# Altium PCB 迷你四轴遥控器.PcbDoc
Units mm, origin at the board's own origin, x right, y up, seen from the top; angles counter-clockwise.
Board outline 122 x 76 mm, 2 copper layers (Top Layer, Bottom Layer); 44 components, 47 nets, 207 pads, 7 vias.
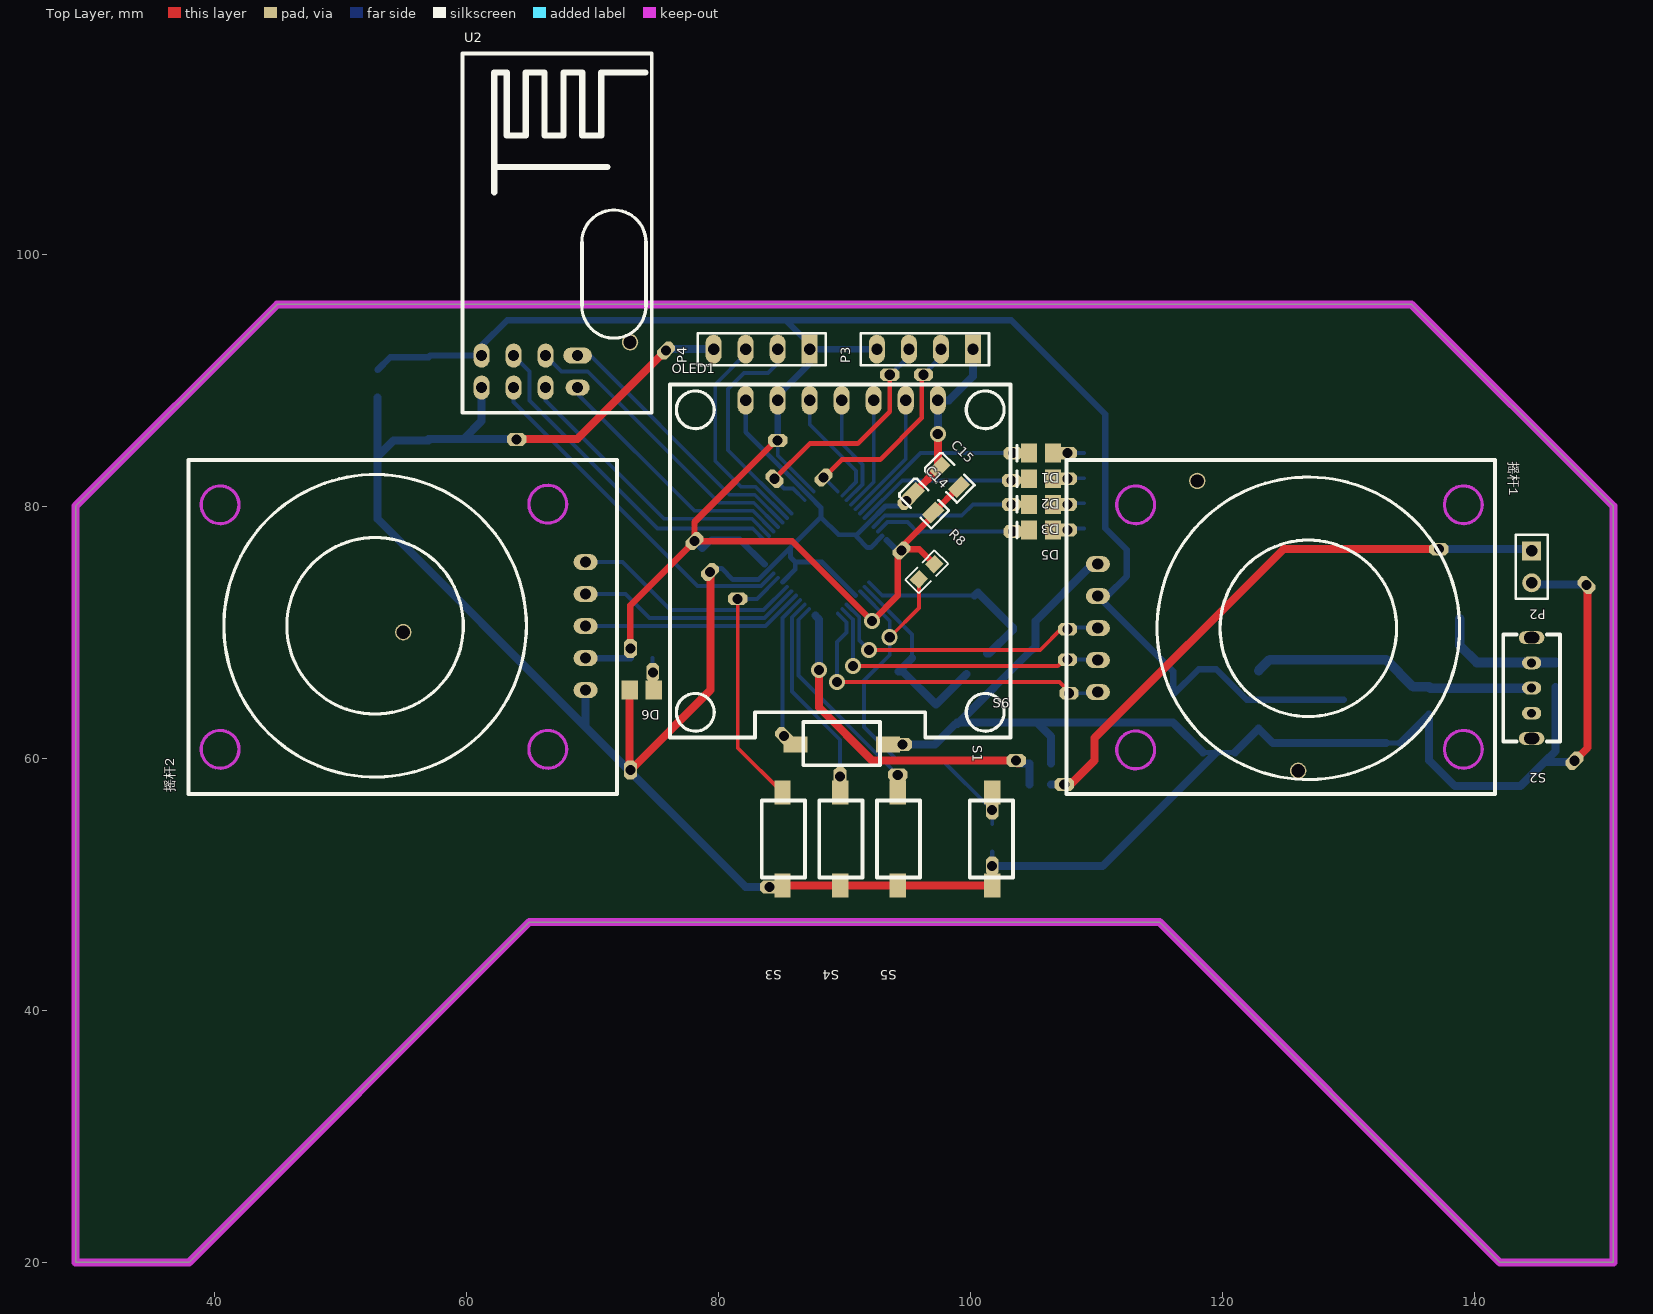
[diagram p0: Top Layer view]
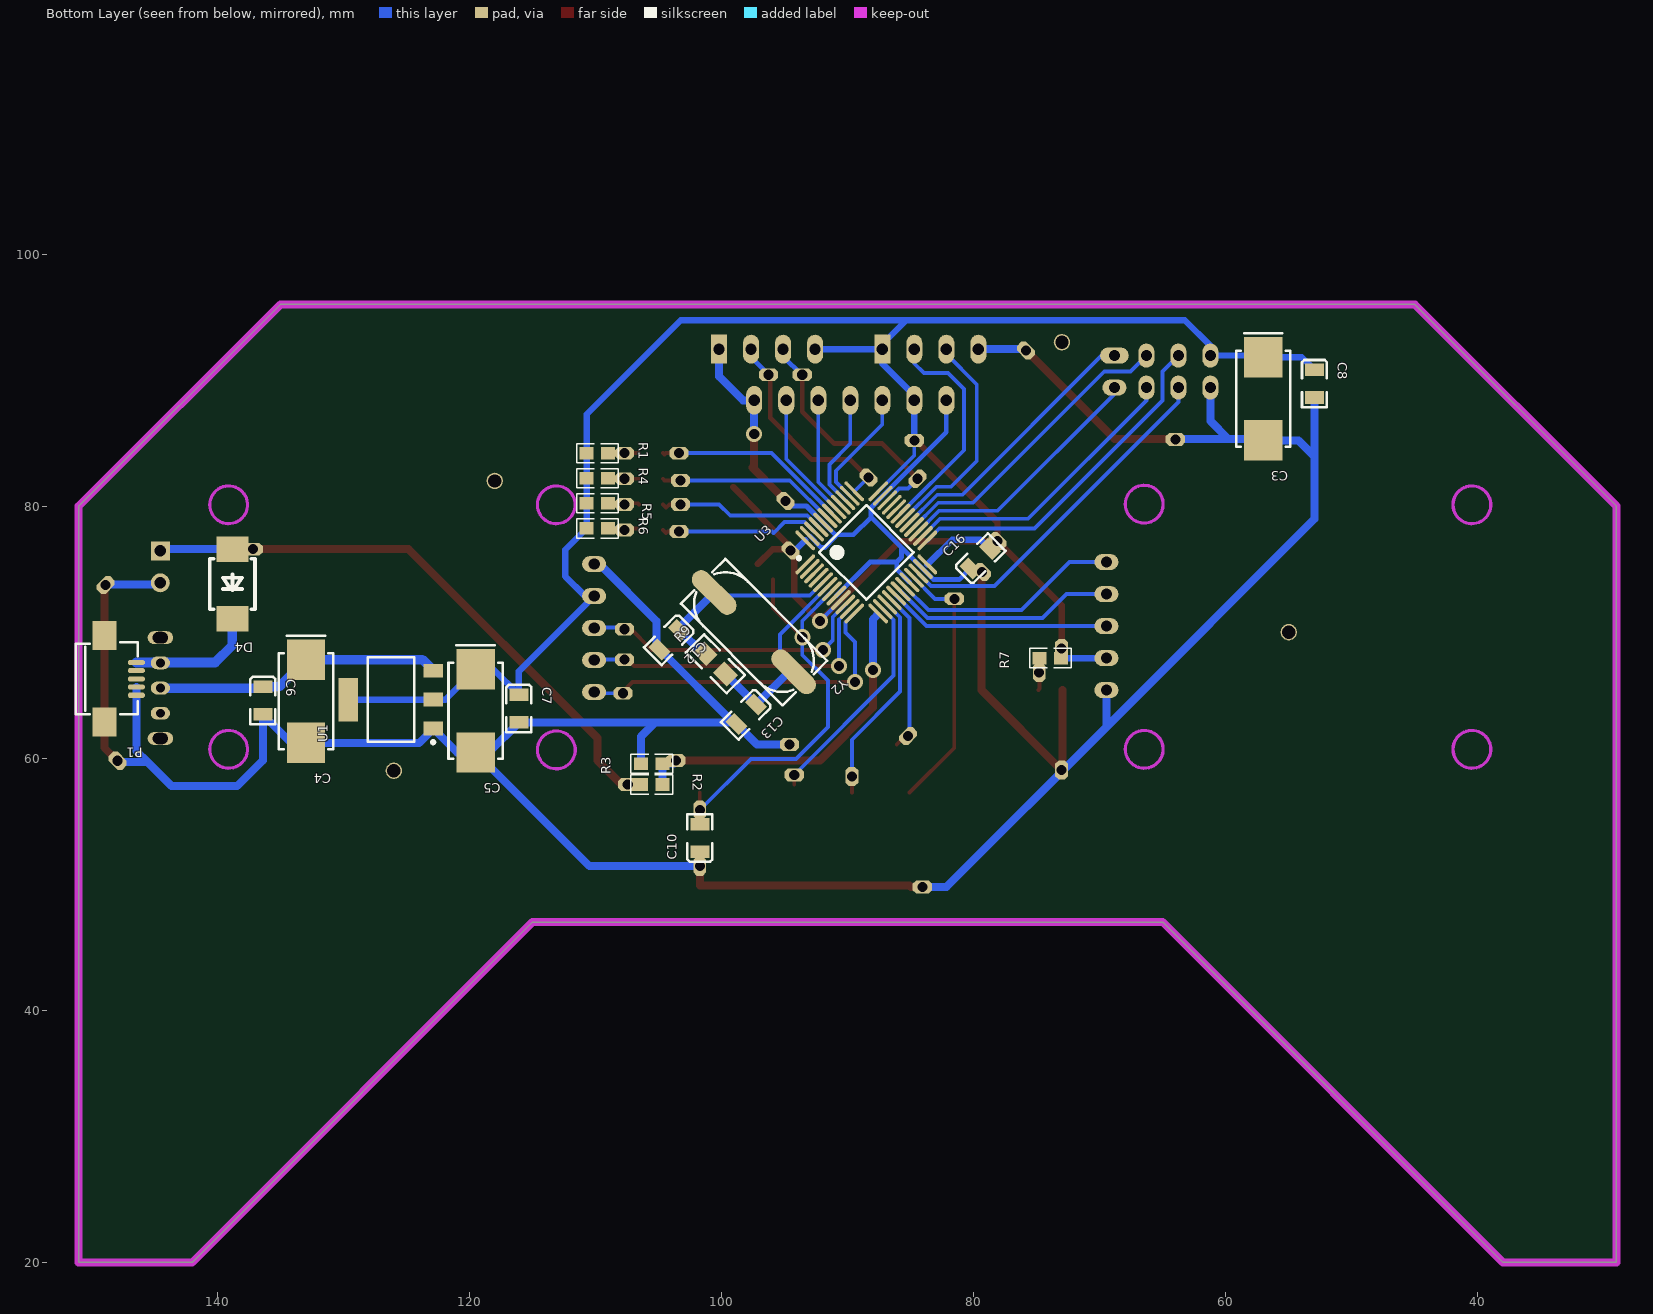
[diagram p1: Bottom Layer view, seen from below]

## Layer stack, top to bottom
Top Solder: solder mask 0.0102, Solder Resist, Dk 3.5
Top Layer: signal copper 0.0356
Dielectric 1: dielectric 0.32, FR-4, Dk 4.8
Bottom Layer: signal copper 0.0356
Bottom Solder: solder mask 0.0102, Solder Resist, Dk 3.5

## Board outline
29,20 29,80 45,96 135,96 151,80 151.003,80 151.003,20 142,20 115,47 65,47 38,20

## Design rules (kind name [scope] priority, off if disabled: settings)
Clearance [All] p1: gap=0.025
PolygonConnect [All] p1: connectstyle=Relief reliefconductorwidth=0.254 reliefentries=4 polygonreliefangle="90 Angle" airgapwidth=0.254
RoutingVias [All] p1: holewidth=0.711 width=1.27 viastyle="Through Hole" minholewidth=0.711 minwidth=1.27 maxholewidth=0.711 maxwidth=1.27
SolderMaskExpansion [All] p1: expansion=0.102
Width [All] p1: maxlimit=3 minlimit=0.254 preferedwidth=0.635
30 further rules are at their usual default settings.

## Components (designator, comment, footprint, x,y, rotation, side; value= is the part's Value field where it differs from the comment)
C3 "Cap Pol" CAP-7343 57.023,88.519 r270 bottom
C4 "Cap Pol" CAP-7343 132.969,64.516 r270 bottom
C5 "Cap Pol" CAP-7343 119.507,63.754 r270 bottom
C6 "Cap" C-0805 136.398,65.659 r270 bottom
C7 "Cap" C-0805 116.078,65.024 r270 bottom
C8 "Cap" C-0805 52.959,90.805 r270 bottom
C10 "Cap" C-0805 101.727,52.578 r90 bottom
C12 "Cap" C-0805 103.364,70.183 r315 bottom
C13 "Cap" C-0805 97.258,64.256 r315 bottom
C14 "Cap" C-0805 95.504,81.026 r315 top
C15 "Cap" C-0805 97.536,83.058 r315 top
C16 "Cap" C-0805 80.264,75.057 r135 bottom
D1 "LED0" LED_0805 105.6,84.201 r180 top
D2 "LED0" LED_0805 105.6,82.169 r180 top
D3 "LED0" LED_0805 105.6,80.137 r180 top
D4 "SS14" DO214AA 138.811,73.914 r270 bottom
D5 "LED0" LED_0805 105.601,78.105 r180 top
D6 "LED0" LED_0805 73.914,65.405 r180 top
OLED1 "OLDE" "OLED -简版" 82.169,88.392 r0 top locked
P1 "USB" USB_MICRO 148.971,66.294 r270 bottom
P2 "Header 2" HDR1X2 144.526,76.454 r270 top
P3 "Header 4" HDR1X4 100.203,92.456 r180 top
P4 "Header 4" HDR1X4 87.249,92.456 r180 top
R1 "Res1" 0603-1 109.855,84.201 r180 bottom
R2 "Res2" 0603-1 105.537,57.912 r180 bottom
R3 "Res2" 0603-1 105.537,59.563 r0 bottom
R4 "Res1" 0603-1 109.855,82.211 r180 bottom
R5 "Res1" 0603-1 109.855,80.222 r180 bottom
R6 "Res1" 0603-1 109.855,78.232 r180 bottom
R7 "Res1" 0603-1 73.914,67.945 r0 bottom
R8 "Res2" 0603-1 96.52,74.803 r45 top
R9 "Res1" 0805 100.401,67.399 r45 bottom
S1 "SW-PB" 贴片开关 89.662,61.087 r0 top locked
S2 "SW-SPDT" 开关-3pin 144.526,67.564 r270 top
S3 "SW-PB" 贴片开关 85.09,53.721 r270 top locked
S4 "SW-PB" 贴片开关 89.662,53.721 r270 top locked
S5 "SW-PB" 贴片开关 94.234,53.721 r270 top locked
S6 "SW-PB" 贴片开关 101.727,53.467 r90 top locked
U1 "ASM1117" SOT-223 126.238,64.643 r90 bottom
U2 "NRF24L01" NRF24L01 61.214,89.408 r0 top
U3 "STM32F103C" LQFP-48_M 88.519,76.327 r135 bottom locked
Y2 "8Mhz" X-SM49 97.437,70.003 r225 bottom
摇杆1 "PS2" PS2游戏摇杆 110.109,75.405 r0 top locked
摇杆2 "PS2" PS2游戏摇杆 69.469,65.405 r180 top locked

## Footprints (in the part's own frame and the unit in brackets; to place one, negate y for a bottom-side part, rotate by r counter-clockwise, add the part's x,y. Pads: shape width x height; smd on the part's side, far side on the other; paste and mask are expansions set on the pad)
0603-1 [mm] "贴片带丝印"
  rect 1.1x1 smd: 1(-0.85,0) 2(0.85,0)
  silkscreen extent -1.65,-0.76 1.65,0.76, body extent -1.14,-0.38 1.14,0.38, height 1
0805 [mil]
  rect 60x50 smd: 1(-40,0) 2(50,0)
  silkscreen extent -85,-40 95,40, body extent -39,-24 39,29, height 26
C-0805 [mm]
  rect 1x1.5 smd: 1(0,0) 2(2.184,0)
  silkscreen extent -0.79,-0.99 2.96,0.99, body extent 0.02,-0.6 2.02,0.6, height 0.95
CAP-7343 [mm] "钽电容"
  rect 3.2x3.05 smd: 1(-3.302,0) 2(3.302,0)
  silkscreen extent -5.21,-2.16 3.81,2.16, body extent -3.68,-1.91 3.68,1.91, height 2.95
DO214AA [mil]
  rect 80x100 smd: 1(-105,0) 2(112,0)
  silkscreen extent -75,-71 82,71
HDR1X2 [mm] "Connector; Header; 2 Position"
  rect 1.5x1.5 hole 0.9: 1(0,0)
  round 1.5 hole 0.9: 2(2.54,0)
  silkscreen extent -1.27,-1.27 3.81,1.27
HDR1X4 [mm] "Connector; Header; 4 Position"
  rect 1.27x2.286 hole 0.9: 1(0,0)
  oval 1.27x2.286 hole 0.9: 2(2.54,0) 3(5.08,0) 4(7.62,0)
  silkscreen extent -1.27,-1.27 8.89,1.27
LED_0805 [mm] "贴片二极管"
  rect 1.3x1.5 smd: 1(-0.95,0) 2(0.95,0)
  silkscreen extent 1.91,-0.64 1.91,0.63
LQFP-48_M [mm] "Thin QFP, 48-Leads, Body 7x7mm, Pitch 0.5mm, IPC Low Density"
  oval 2.1x0.3 smd: 1(-4.1,2.75) 2(-4.1,2.25) 3(-4.1,1.75) 4(-4.1,1.25) 5(-4.1,0.75) 6(-4.1,0.25) 7(-4.1,-0.25) 8(-4.1,-0.75) 9(-4.1,-1.25) 10(-4.1,-1.75) 11(-4.1,-2.25) 12(-4.1,-2.75) 25(4.1,-2.75) 26(4.1,-2.25) 27(4.1,-1.75) 28(4.1,-1.25) 29(4.1,-0.75) 30(4.1,-0.25) 31(4.1,0.25) 32(4.1,0.75) 33(4.1,1.25) 34(4.1,1.75) 35(4.1,2.25) 36(4.1,2.75)
  oval 0.3x2.1 smd: 13(-2.75,-4.1) 14(-2.25,-4.1) 15(-1.75,-4.1) 16(-1.25,-4.1) 17(-0.75,-4.1) 18(-0.25,-4.1) 19(0.25,-4.1) 20(0.75,-4.1) 21(1.25,-4.1) 22(1.75,-4.1) 23(2.25,-4.1) 24(2.75,-4.1) 37(2.75,4.1) 38(2.25,4.1) 39(1.75,4.1) 40(1.25,4.1) 41(0.75,4.1) 42(0.25,4.1) 43(-0.25,4.1) 44(-0.75,4.1) 45(-1.25,4.1) 46(-1.75,4.1) 47(-2.25,4.1) 48(-2.75,4.1)
  silkscreen extent -4.22,-2.65 2.65,3.57, body extent -3.5,-3.5 3.5,3.5, height 1.6
NRF24L01 [mil]
  oval 50x75 hole 35: 1(0,0) 2(0,100) 3(100,0) 4(100,100) 5(200,0) 6(200,100)
  oval 75x50 hole 35: 7(300,0)
  oval 90x50 hole 35: 8(300,100)
  silkscreen extent -59,-79 531,1043
"OLED -简版" [mil]
  oval 50x90 hole 35: 1(0,0) 2(100,0) 3(200,0) 4(300,0) 5(400,0) 6(500,0) 7(600,0)
  silkscreen extent -236,-1053 827,49
PS2游戏摇杆 [mil]
  oval 75x50 hole 35: 1(0,0) 2(0,-100) 3(0,-200) 4(0,-300) 5(0,-400)
  Keep-Out Layer circle w10: c118.11,185.04 r59.06
  Keep-Out Layer circle w10: c118.11,-580.71 r59.06
  Keep-Out Layer circle w10: c1141.73,-578.74 r59.06
  Keep-Out Layer circle w10: c1141.73,185.04 r59.06
  silkscreen extent -98,-719 1240,325
SOT-223 [mm]
  rect 1.1x1.55 smd: 1(-2.3,-3.375) 2(0,-3.375) 3(2.3,-3.375)
  rect 3.45x1.55 smd: 4(0,3.375)
  silkscreen extent -3.5,-3.48 3.35,1.85, body extent -3.3,-3.94 3.3,3.43, height 0.8
USB_MICRO [mm] "USB方孔"
  oct 0.4x1.35 smd: 1(-1.3,2.54) 2(-0.65,2.54) 3(0,2.54) 4(0.65,2.54) 5(1.3,2.54)
  rect 2.286x1.9 smd: 6(3.429,0) 7(-3.429,0)
  silkscreen extent -2.92,-2.29 2.79,2.67
X-SM49 [mm]
  oval 4.4x1.5 smd: 1(4.45,0.004) 2(-4.45,-0.004)
  silkscreen extent -5.7,-2.5 5.72,2.5
开关-3pin [mil]
  oval 40x60 hole 27.56: 1(0,0) 2(78.74,0) 3(157.48,0)
  oval 40x80 hole 35.43 slot 47.24 at 90 deg: ""(-78.74,0) ""(236.22,0)
  silkscreen extent -89,-89 246,89
贴片开关 [mm]
  rect 1.9x1.3 smd: 1(-3.556,0) 2(3.81,0)
  silkscreen extent -2.92,-1.65 3.17,1.78, body extent -3.91,-1.78 4.23,1.82, height 2.49

## Part data
C3 C4 C5: "极性电解电容"
C6 C7 C8: "无极性电容"
C10 C12 C13 C14 C15 C16: "Capacitor"
D1 D2 D3 D5 D6: "发光二极管"
D4: library part "Diode 1N4007", "1 Amp General Purpose Rectifier"
OLED1: library part OLED-0.96寸
P2: "Header, 2-Pin"
P3 P4: "Header, 4-Pin"
R1 R4 R5 R6 R7 R9: "贴片电阻"
R2 R3 R8: "Resistor"
S1 S3 S4 S5 S6: "Switch"
S2: "SPDT Subminiature Toggle Switch, Right Angle Mounting, Vertical Actuation"
U1: "3.3V稳压芯片"
U3: "STM32单片机48引脚"
Y2: library part XTAL, "Crystal Oscillator"
摇杆1 摇杆2: library part PS2游戏摇杆

## Free pads (board coordinates)
  round 1.3 hole 1.05: 0(73,93) 6(118,82) 7(126,59) 8(55,70)
  oct 1.524x1.016 hole 0.8: ""(63.999,85.291) ""(81.534,72.644) ""(84.074,49.784) ""(84.709,85.217) ""(93.599,90.424) ""(94.234,58.674) ""(94.615,61.087) ""(96.266,90.424) ""(103.251,80.137) ""(103.251,82.042) ""(103.378,77.978) ""(103.378,84.201) ""(103.632,59.817) ""(107.442,57.912) ""(107.696,67.818) ""(107.696,70.231) ""(107.696,78.105) ""(107.696,80.137) ""(107.696,82.169) ""(107.696,84.201) ""(107.823,65.151) ""(137.16,76.581)
  oct 1.016x1.524 hole 0.8: ""(73.025,59.055) ""(73.025,68.707) ""(74.803,66.802) ""(89.662,58.547) ""(101.727,51.435) ""(101.727,55.88)
  oct 1.016x1.524 hole 0.8 rot 135: ""(75.863,92.351) ""(78.105,77.216) ""(79.331,74.781) ""(88.348,82.274) ""(94.532,76.476) ""(94.913,80.413) ""(147.911,59.795)
  oct 1.016x1.524 hole 0.8 rot 45: ""(84.455,82.169) ""(85.195,61.766) ""(148.866,73.743)

## Via types
v1: diameter 1.27, hole 0.8, Top Layer to Bottom Layer, 7 vias

## Nets (pads, with @x,y where several pads share a name; then routed paths per layer and width w, separated by ;. In a path a pad name is that pad's centre, name@x,y a point inside that pad or via, vN(x,y) a via of type N, cw(c..) or ccw(c..) an arc to the next point about the centre after c; other vN are vias at no path point)
+3.3V: C3.1 C5.1 C7.1 C8.1 C14.2 C15.2 C16.2 OLED1.2 P3.4 P4.1 pad.@73.025,68.707 pad.@78.105,77.216 pad.@84.709,85.217 pad.@94.532,76.476 R1.1 R4.1 R5.1 R6.1 R7.1 R8.2 U1.2 U1.4 U2.2 U3.9 U3.24 U3.36 U3.48 摇杆1.2 摇杆2.2 | length 196.9
  Top Layer w0.508: pad.@73.025,68.961 73.025,72.136 pad.@78.105,77.216 ; pad.@84.709,85.344 78.105,78.74 pad.@78.105,77.216 ; R8.2 95.944,76.581 pad.@94.742,76.581 ; C15.2 C14.2 97.049,79.269 94.742,76.962 pad.@94.742,76.581 ; pad.@78.105,77.216 85.862,77.216 v1(92.202,70.876) 94.234,72.908 94.234,76.073 pad.@94.742,76.581
  Bottom Layer w0.305: pad.@84.709,85.217 84.709,84.026 U3.36 ; U3.9 v1(92.202,70.876)
  Bottom Layer w0.508: C8.1 53.975,91.821 C3.1 57.15,91.948 U2.2 61.214,92.71 63.246,94.742 85.344,94.742 ; 摇杆2.2 R7.1 73.025,67.984 pad.@73.025,68.961 ; pad.@78.105,77.216 C16.2 79.461,77.343 81.705,77.343 U3.24 ; pad.@84.709,85.217 OLED1.2 84.709,88.773 87.249,91.313 P4.1 ; P3.4 P4.1 ; U3.48 94.063,76.581 pad.@94.742,76.581 ; U1.4 U1.2 121.92,64.643 C5.1 118.11,67.056 C7.1 116.078,66.896 摇杆1.2 110.838,72.865 112.395,74.422 112.395,76.542 R6.1 R5.1 R4.1 R1.1 110.705,87.288 103.251,94.742 85.344,94.742 ; 85.344,94.742 87.249,92.837 P4.1
+5V: C4.1 C6.1 S2.2 U1.3 | length 23
  Bottom Layer w0.762: U1.3 123.738,67.818 C4.1 135.128,65.659 C6.1 136.493,65.564 S2.2
BAT+: D4.1 P2.1 pad.@107.442,57.912 pad.@137.16,76.581 R2.1 | length 47.1
  Top Layer w0.635: pad.@107.442,57.912 107.95,57.912 109.855,59.817 109.855,61.595 124.841,76.581 137.287,76.581 pad.@137.16,76.708
  Bottom Layer w0.635: R2.1 pad.@107.442,57.912 ; pad.@137.287,76.581 D4.1 144.399,76.581 P2.1
BAT-: C3.2 C4.2 C5.2 C6.2 C7.2 C8.2 C10.1 C12.2 C13.2 C14.1 C15.1 C16.1 D6.2 OLED1.1 OLED1.7 P1.4 P1.5 P2.2 P3.1 P4.4 pad.@63.999,85.291 pad.@73.025,59.055 pad.@75.863,92.351 pad.@79.331,74.781 pad.@84.074,49.784 pad.@94.615,61.087 pad.@94.913,80.413 pad.@101.727,51.435 pad.@147.911,59.795 pad.@148.866,73.743 R3.2 S1.2 S3.2 S4.2 S5.2 S6.1 U1.1 U2.1 U3.8 U3.20 U3.23 U3.35 U3.44 U3.47 摇杆1.1 摇杆2.1 | length 324.8
  Top Layer w0.635: pad.@63.881,85.344 68.834,85.344 pad.@75.946,92.456 ; D6.2 72.964,58.989 79.375,65.4 pad.@79.375,74.549 ; pad.@84.074,49.784 84.963,49.784 S3.2 S4.2 S5.2 S6.1 pad.@101.727,51.435 ; pad.@94.869,80.518 94.996,80.518 C14.1 C15.1 97.409,83.185 v1(97.409,85.725) ; pad.@147.955,59.817 148.971,60.833 pad.@148.971,73.787
  Bottom Layer w0.381: C3.2@56.999,85.339 C3.2@57.023,85.344 ; U2.1 U2.1@61.214,89.535 ; pad.@63.876,85.339 pad.@63.881,85.344 ; pad.@79.331,74.781 79.607,75.057 C16.1 81.153,74.168 83.178,74.168 U3.23 85.718,76.708 ; OLED1.1 82.169,85.859 U3.35 88.138,79.89 88.138,79.128 ; U3.20 86.106,74.975 86.106,75.565 ; U3.8 88.22,75.565 86.106,75.565 ; U3.47 92.082,76.708 91.821,76.708 90.977,77.552 90.977,77.724 ; pad.@94.869,80.518 94.361,80.01 93.263,80.01 U3.44 90.977,77.724 ; C13.2@98.931,62.84 C13.2 C13.2@98.982,62.711 ; pad.@101.727,51.435 C10.1 ; C12.2 C12.2@105.156,68.885 ; 摇杆1.1@109.695,75.405 摇杆1.1 ; C5.2@118.466,60.452 C5.2 C5.2@120.972,60.452 ; C4.2 C4.2@134.137,61.214 ; P2.2 P2.2@144.653,73.787 ; pad.@147.828,59.69 pad.@147.955,59.817 ; 85.718,76.708 85.725,76.701 85.725,75.946 86.106,75.565 ; 85.718,76.708 88.138,79.128 ; 88.138,79.128 89.542,77.724 90.977,77.724
  Bottom Layer w0.635: C8.2 52.959,83.947 ; C3.2@56.999,85.339 59.812,85.339 ; C3.2 54.229,85.217 52.959,83.947 ; U2.1 61.214,86.741 59.812,85.339 ; pad.@63.876,85.339 59.812,85.339 ; 摇杆2.1 69.469,62.484 ; pad.@75.946,92.456 P4.4 ; pad.@84.074,49.784 82.169,49.784 69.469,62.484 ; pad.@94.869,61.087 97.178,61.087 C13.2 ; v1(97.409,85.725) OLED1.7 98.298,88.392 100.203,90.297 P3.1 ; C13.2@98.931,62.84 105.258,62.84 ; C13.2@98.982,62.711 C12.2 ; pad.@101.727,51.435 110.49,51.435 C5.2 ; C12.2@105.156,68.885 105.156,70.866 摇杆1.1@109.695,75.405 ; R3.2 106.387,61.71 105.258,62.84 ; C5.2@118.466,60.452 C7.2 105.258,62.84 ; C5.2@120.972,60.452 U1.1 123.992,61.214 C4.2 ; C4.2@134.137,61.214 C6.2 136.398,59.817 138.43,57.785 143.637,57.785 145.542,59.69 ; P2.2@144.653,73.787 pad.@148.971,73.787 ; P1.4 P1.5 146.431,60.579 145.542,59.69 ; pad.@147.828,59.69 145.542,59.69 ; 52.959,83.947 52.959,78.994 69.469,62.484
BAT_TEST: pad.@103.632,59.817 R2.2 R3.1 U3.13 | length 27.6
  Top Layer w0.635: v1(88,67) 88,64.019 92.202,59.817 103.505,59.817 pad.@103.759,59.563
  Bottom Layer w0.635: 87.691,71.308 88,71 v1(88,67) ; pad.@103.759,59.563 R3.1 R2.2
CE: U2.3 U3.22 | length 28.2
  Bottom Layer w0.305: U2.3 63.754,88.265 78.359,73.66 83.377,73.66 U3.22
CSN: U2.4 U3.25 | length 27.3
  Bottom Layer w0.305: U2.4 65.024,90.678 65.024,88.392 75.184,78.232 82.725,78.232 U3.25
D+: P1.3
D-: P1.2
IRQ: U2.8 U3.29 | length 21.7
  Bottom Layer w0.305: U2.8 69.85,91.948 80.899,80.899 82.886,80.899 U3.29
LED1: D1.2 pad.@103.378,84.201 U3.42 | length 15.5
  Top Layer w0.305: pad.@103.505,84.201 104.396,84.201 104.523,84.074 D1.2
  Bottom Layer w0.305: U3.42 96.039,84.201 pad.@103.505,84.201
LED2: D2.2 pad.@103.251,82.042 U3.43 | length 14.3
  Top Layer w0.305: pad.@103.505,82.042 104.523,82.042 D2.2
  Bottom Layer w0.305: U3.43 94.588,82.042 pad.@103.505,82.042
LED3: D3.2 pad.@103.251,80.137 U3.45 | length 13.3
  Top Layer w0.305: pad.@103.505,80.137 104.142,80.137 104.396,79.883 D3.2
  Bottom Layer w0.305: U3.45 93.208,79.248 99.314,79.248 100.203,80.137 pad.@103.505,80.137
LED4: D5.2 pad.@103.378,77.978 U3.46 | length 12.9
  Top Layer w0.305: pad.@103.505,77.978 104.269,77.978 104.396,77.851 D5.2
  Bottom Layer w0.305: U3.46 93.407,78.74 94.996,78.74 95.885,77.851 96.012,77.978 pad.@103.505,77.978
MISO: U2.7 U3.27 | length 20.6
  Bottom Layer w0.305: U2.7 68.834,88.9 78.105,79.629 82.742,79.629 U3.27
MOSI: U2.6 U3.28 | length 24.1
  Bottom Layer w0.305: U2.6 67.564,90.678 69.637,90.678 80.051,80.264 82.814,80.264 U3.28
NetD1_1: D1.1 pad.@107.696,84.201 R1.2 | length 2.5
  Top Layer w0.305: D1.1 pad.@107.95,84.201
  Bottom Layer w0.305: pad.@107.95,84.201 R1.2
NetD2_1: D2.1 pad.@107.696,82.169 R4.2 | length 2.5
  Top Layer w0.305: D2.1 107.95,82.169 pad.@107.992,82.211
  Bottom Layer w0.305: pad.@107.992,82.211 R4.2
NetD3_1: D3.1 pad.@107.696,80.137 R5.2 | length 2.5
  Top Layer w0.305: D3.1 106.635,80.222 pad.@107.865,80.222
  Bottom Layer w0.305: pad.@107.865,80.222 R5.2
NetD5_1: D5.1 pad.@107.696,78.105 R6.2 | length 2.5
  Top Layer w0.305: D5.1 106.678,78.232 pad.@107.823,78.232
  Bottom Layer w0.305: pad.@107.823,78.232 R6.2
NetD6_1: D6.1 pad.@74.803,66.802 R7.2 | length 2.6
  Top Layer w0.305: pad.@74.803,66.802 74.764,66.841 74.764,65.505 D6.1
  Bottom Layer w0.305: pad.@74.764,66.841 R7.2
NRST: C10.2 pad.@101.727,55.88 R8.1 S6.2 U3.7 | length 33.6
  Top Layer w0.305: v1(93.599,69.596) 95.919,71.916 R8.1 ; pad.@101.727,55.88 S6.2
  Bottom Layer w0.305: U3.7 93.599,70.893 v1(93.599,69.596) 93.599,68.199 91.567,66.167 91.567,62.484 94.107,59.944 97.663,59.944 101.727,55.88 C10.2
OLED_DC: OLED1.6 U3.41 | length 10.3
  Bottom Layer w0.305: U3.41 94.869,83.738 OLED1.6
OLED_RES: OLED1.5 U3.40 | length 9
  Bottom Layer w0.305: U3.40 92.329,81.905 OLED1.5
OLED_SCL: OLED1.3 U3.38 | length 9.6
  Bottom Layer w0.305: OLED1.3 87.249,86.487 90.932,82.804 90.932,81.922 U3.38
OLED_SDA: OLED1.4 U3.39 | length 9.1
  Bottom Layer w0.305: OLED1.4 89.789,84.963 91.44,83.312 91.44,81.723 U3.39
OSC_IN: C12.1 R9.2 U3.5 Y2.2 | length 16.1
  Bottom Layer w0.305: U3.5 93.009,72.898 Y2.2@100.338,72.898
  Bottom Layer w0.635: Y2.2@100.338,72.898 Y2.2 103.364,70.369 C12.1 101.478,68.297 R9.2
OSC_OUT: C13.1 R9.1 U3.6 Y2.1 | length 16.2
  Bottom Layer w0.305: U3.6 95.377,69.823 Y2.1@95.377,67.949
  Bottom Layer w0.635: Y2.1@95.377,67.949 Y2.1 94.654,66.859 C13.1 R9.1
PC14: U3.3
PC15: U3.4
POWER: D4.2 P1.1 S2.1 | length 10.3
  Bottom Layer w0.762: D4.2 138.811,68.961 140.178,67.594 P1.1
RX1: P4.2 U3.31 | length 17.9
  Bottom Layer w0.305: P4.2 84.709,91.313 83.947,90.551 82.042,90.551 80.772,89.281 80.772,84.428 U3.31
S1: pad.@85.195,61.766 S1.1 U3.16 | length 13
  Top Layer w0.305: pad.@85.09,61.849 85.09,62.103 S1.1
  Bottom Layer w0.305: pad.@85.09,61.849 85.09,71.12 85.085,71.125 U3.16
S2: pad.@81.534,72.644 S3.1 U3.21 | length 20.6
  Top Layer w0.305: pad.@81.788,72.644 81.534,72.39 81.534,60.833 S3.1
  Bottom Layer w0.305: pad.@81.788,72.644 83.068,72.644 U3.21
S3: pad.@89.662,58.547 S4.1 U3.15 | length 16.9
  Top Layer w0.305: S4.1 pad.@89.662,58.674
  Bottom Layer w0.305: U3.15 85.852,71.185 85.852,65.278 89.662,61.468 pad.@89.662,58.674
S4: pad.@94.234,58.674 S5.1 U3.14 | length 17.5
  Top Layer w0.305: S5.1@94.234,57.912 pad.@94.234,58.674
  Bottom Layer w0.305: U3.14 86.36,70.986 86.36,66.548 pad.@94.234,58.674
SCLK: U2.5 U3.26 | length 23.2
  Bottom Layer w0.305: U2.5 66.294,88.392 75.692,78.994 82.67,78.994 U3.26
SW1: pad.@107.823,65.151 U3.12 摇杆1.5 | length 27.2
  Top Layer w0.305: v1(89.408,66.04) 107.061,66.04 pad.@107.95,65.151
  Bottom Layer w0.305: v1(89.408,66.04) 89.408,69.215 90.17,69.977 90.17,70.787 U3.12 ; pad.@107.95,65.151 109.949,65.151 110.076,65.278 摇杆1.5
SW2: U3.19 摇杆2.5 | length 18.3
  Bottom Layer w0.305: 摇杆2.5 72.39,75.565 76.2,71.755 83.593,71.755 U3.19
SWCLK: P3.2 pad.@88.348,82.274 pad.@96.266,90.424 U3.37 | length 17.4
  Top Layer w0.381: pad.@88.392,82.252 88.392,82.296 89.789,83.693 92.837,83.693 96.139,86.995 pad.@96.139,90.297
  Bottom Layer w0.305: pad.@88.392,82.252 U3.37 ; P3.2@97.663,91.821 P3.2
  Bottom Layer w0.381: pad.@96.139,90.297 P3.2@97.663,91.821
SWDIO: P3.3 pad.@84.455,82.169 pad.@93.599,90.424 U3.34 | length 20.1
  Top Layer w0.381: pad.@84.455,82.169 87.249,84.963 91.059,84.963 93.599,87.503 pad.@93.599,90.424
  Bottom Layer w0.305: pad.@84.455,82.169 85.217,81.407 85.914,81.407 U3.34 ; P3.3@95.123,91.821 P3.3
  Bottom Layer w0.381: pad.@93.599,90.424 P3.3@95.123,91.821
TX1: P4.3 U3.30 | length 17.4
  Bottom Layer w0.305: P4.3 82.169,92.075 79.756,89.662 79.756,83.566 81.788,81.534 82.958,81.534 U3.30
VBAT: U3.1
VRX1: pad.@107.696,70.231 U3.10 摇杆1.3 | length 23.2
  Top Layer w0.305: v1(91.948,68.58) 105.537,68.58 107.315,70.358 pad.@107.823,70.358
  Bottom Layer w0.305: U3.10 91.186,71.185 91.186,69.342 v1(91.948,68.58) ; pad.@107.823,70.358 摇杆1.3@110.076,70.358
VRX2: U3.17 摇杆2.3 | length 17.7
  Bottom Layer w0.305: 摇杆2.3 83.738,70.485 U3.17
VRY1: pad.@107.696,67.818 U3.11 摇杆1.4 | length 24.5
  Top Layer w0.305: v1(90.678,67.31) 106.934,67.31 107.442,67.818 pad.@107.95,67.818
  Bottom Layer w0.305: U3.11 90.675,70.99 90.678,70.993 v1(90.678,67.31) ; pad.@107.95,67.818 109.888,67.818 摇杆1.4@110.015,67.691
VRY2: U3.18 摇杆2.4 | length 18
  Bottom Layer w0.305: 摇杆2.4 72.644,73.025 74.549,71.12 83.666,71.12 U3.18
pads on no net: P1.6 P1.7 S2. S2.3 U3.2 U3.32 U3.33

## Keep-outs
Keep-Out Layer:
  lines w0.635: 151,80 135,96 45,96 29,80 29,20 38,20 65,47 115,47 142,20 151.003,20 151.003,80